# Altium PCB PCB2.PcbDoc
Units mm, origin at the board's own origin, x right, y up, seen from the top; angles counter-clockwise.
Board outline 30.05 x 22.15 mm, 2 copper layers (Top Layer, Bottom Layer); 7 components, 5 nets, 17 pads, 1 vias.
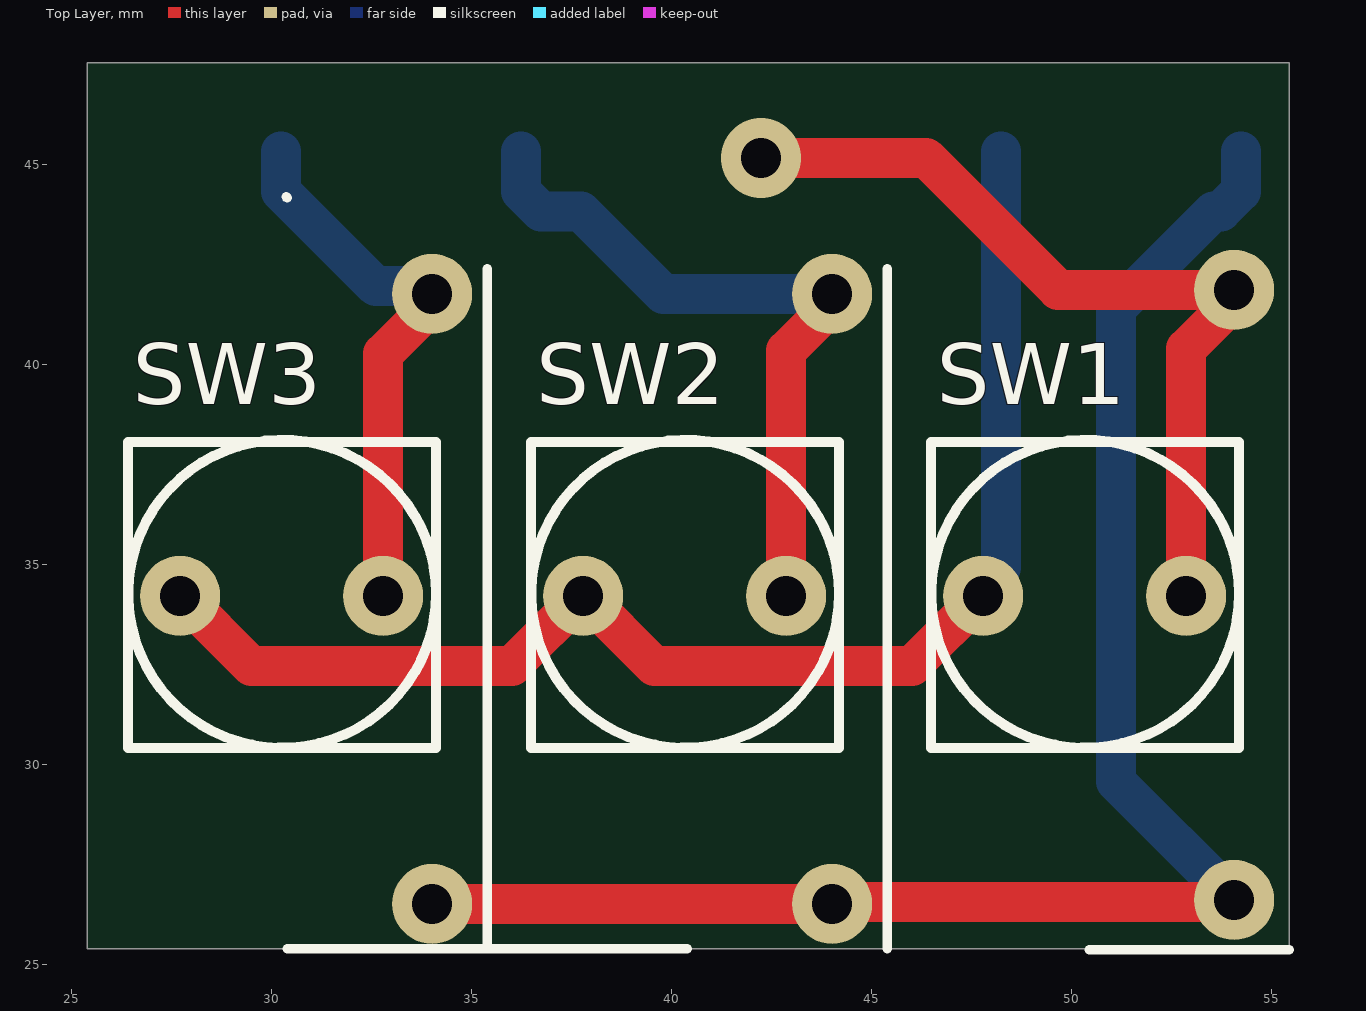
[diagram p0: Top Layer view]
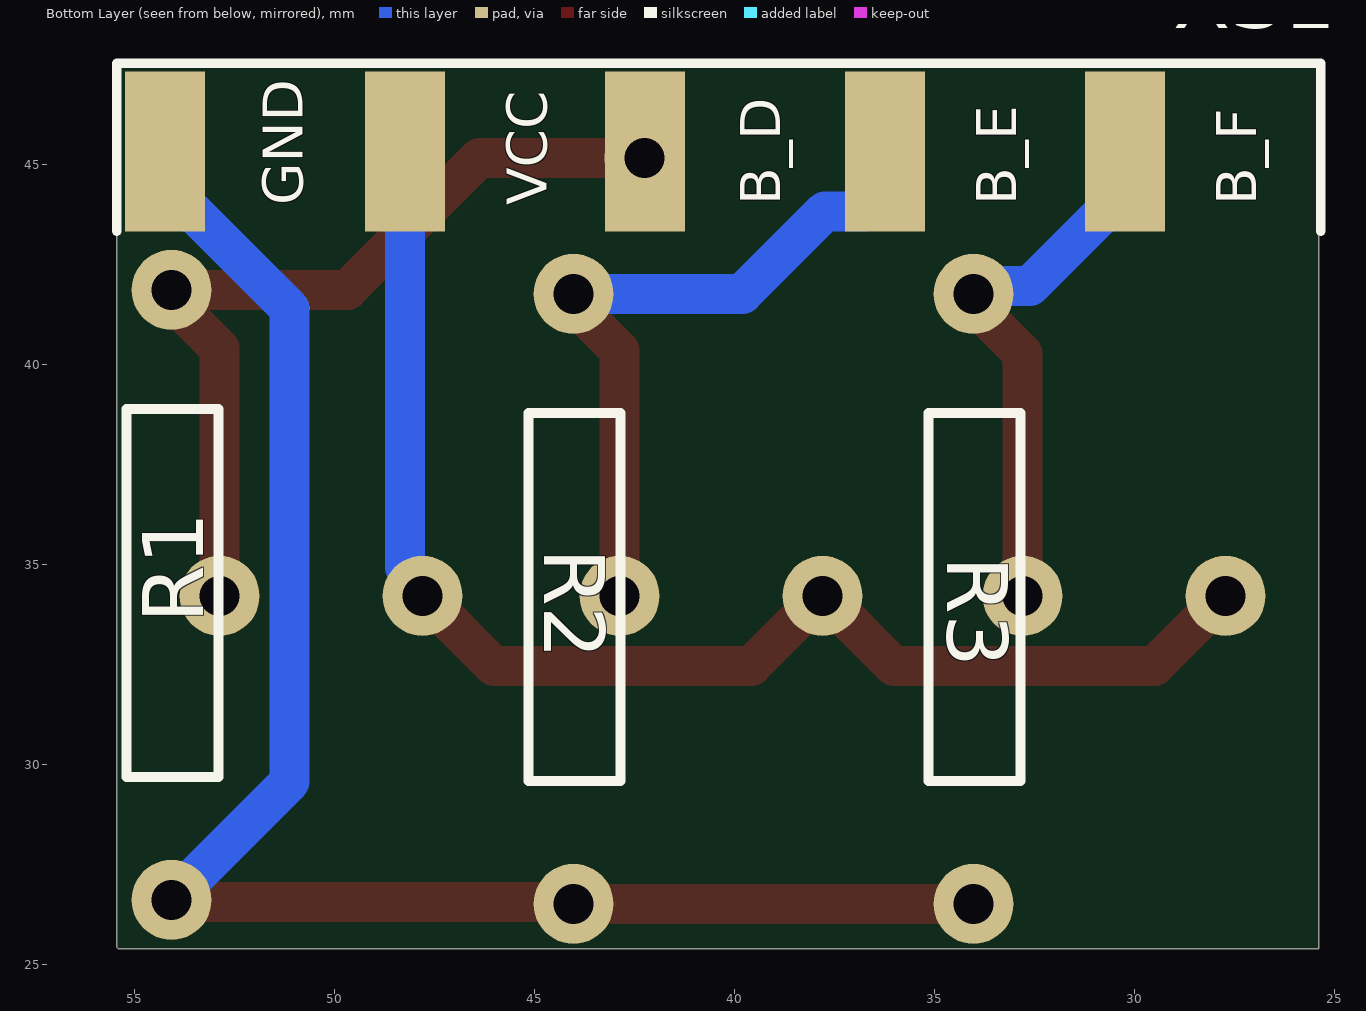
[diagram p1: Bottom Layer view, seen from below]
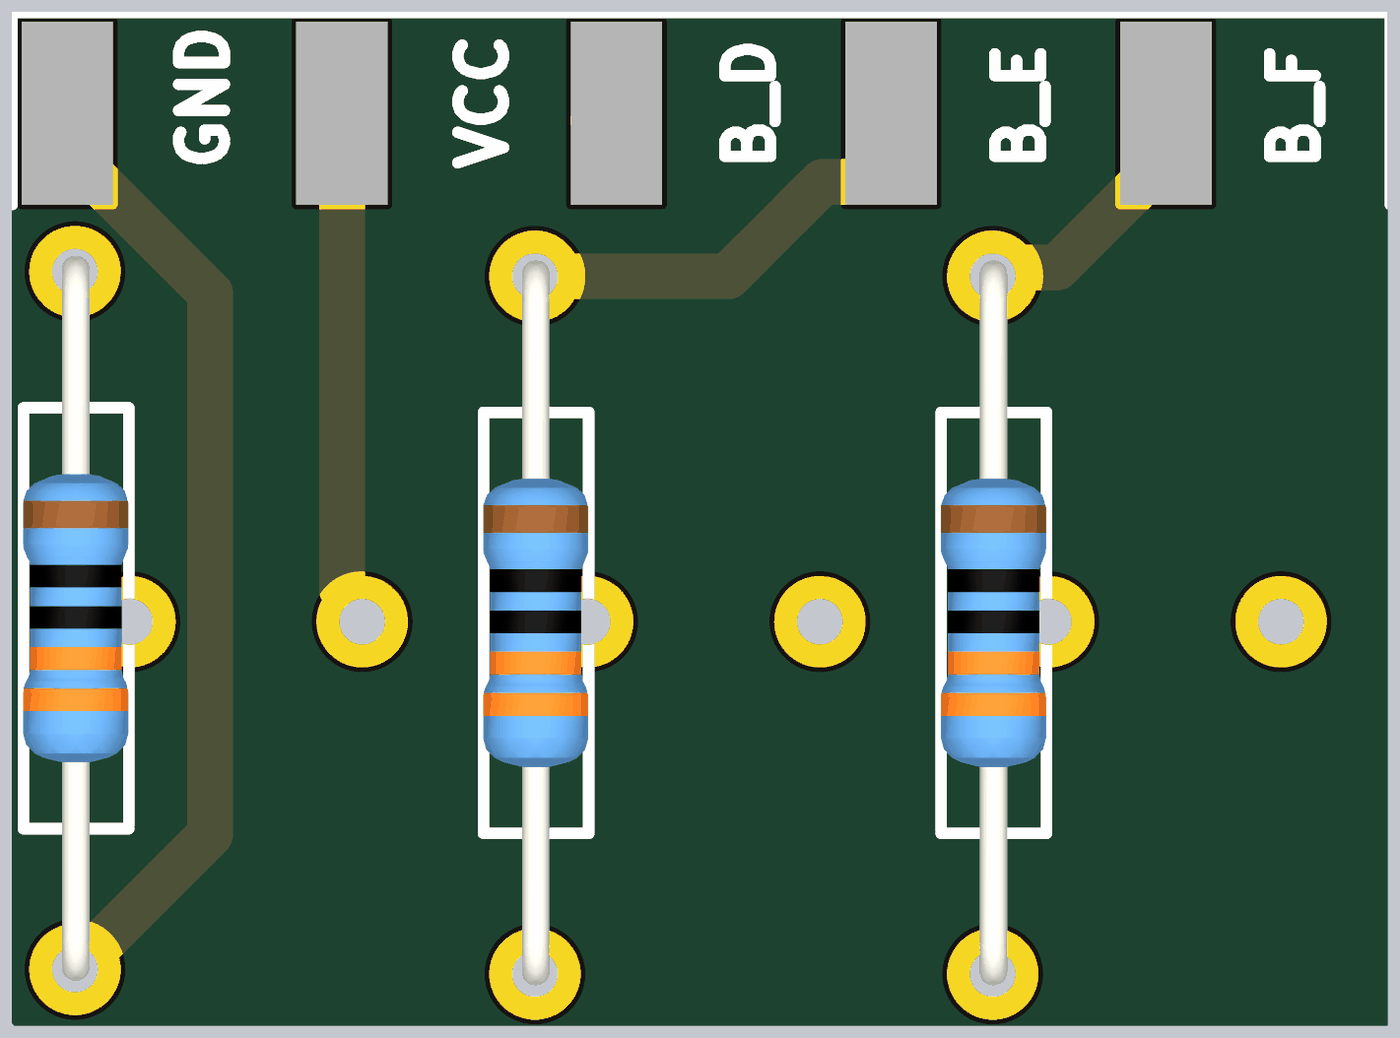
[diagram p2: 3D render of the assembled board from below, using the file's embedded part models]

## Layer stack, top to bottom
Top Solder: solder mask 0.0102, Solder Resist, Dk 3.5
Top Layer: signal copper 0.0356
Dielectric 1: dielectric 0.32, FR-4, Dk 4.8
Bottom Layer: signal copper 0.0356
Bottom Solder: solder mask 0.0102, Solder Resist, Dk 3.5

## Board outline
25.4,25.4 55.4,25.4 55.45,25.45 55.45,47.55 25.4,47.55

## Design rules (kind name [scope] priority, off if disabled: settings)
Clearance [All] p1: gap=0.254 ignorepadtopadclearanceinfootprint=FALSE
PolygonConnect [All] p1: connectstyle=Relief reliefconductorwidth=0.254 reliefentries=4 polygonreliefangle="90 Angle" airgapwidth=0.254
RoutingVias [All] p1: holewidth=0.711 width=1.27 viastyle="Through Hole" minholewidth=0.711 minwidth=1.27 maxholewidth=0.711 maxwidth=1.27
SolderMaskExpansion [All] p1: expansion=0.102 istentingtop=FALSE
SupplyNets "Schematic Supply Nets_1" [InNet('GND')] p1: voltage=0.000
SupplyNets "Schematic Supply Nets" [InNet('+5V')] p2: voltage=0.000
Width [All] p1: maxlimit=1 minlimit=0.3 preferedwidth=0.5 minimp=50.000000 maximp=50.000000 favimp=50.000000
30 further rules are at their usual default settings.

## Classes and differential pairs
component class Sheet2: R1 R2 R3 SW1 SW2 SW3

## Components (designator, comment, footprint, x,y, rotation, side; value= is the part's Value field where it differs from the comment)
R1 "resistor" Resistor 54.05,34.3 r0 bottom
R2 "resistor" Resistor 44,34.2 r0 bottom
R3 "resistor" Resistor 34,34.2 r0 bottom
SW1 "button" button 50.35,34.275 r180 top
SW2 "button" button 40.35,34.275 r180 top
SW3 "button" button 30.275,34.275 r180 top
XS1 "Connector" ConnectionModule 54.243,45.339 r180 bottom

## Footprints (in the part's own frame and the unit in brackets; to place one, negate y for a bottom-side part, rotate by r counter-clockwise, add the part's x,y. Pads: shape width x height; smd on the part's side, far side on the other; paste and mask are expansions set on the pad)
button [mm]
  round 2 hole 1: 1(-2.525,0.05) 2(2.55,0.05)
  silkscreen extent -3.85,-3.85 3.85,3.85
ConnectionModule [mm]
  rect 2x4 smd: 1(0,0) 2(6,0) 3(12,0) 4(18,0) 5(24,0)
  silkscreen extent -1.2,-2 28.9,2.2
Resistor [mm]
  round 2 hole 1: 1(0.025,7.675) 2(0.025,-7.575)
  silkscreen extent -1.15,-4.6 1.15,4.6, body extent -1.14,-7.92 1.15,7.92, height 2.3

## Part data
XS1: library part ConnectionModule

## Via types
v1: diameter 2, hole 1, Top Layer to Bottom Layer, 1 vias

## Nets (pads, with @x,y where several pads share a name; then routed paths per layer and width w, separated by ;. In a path a pad name is that pad's centre, name@x,y a point inside that pad or via, vN(x,y) a via of type N, cw(c..) or ccw(c..) an arc to the next point about the centre after c; other vN are vias at no path point)
+5V: SW1.2 SW2.2 SW3.2 XS1.2 | length 34.3
  Top Layer w1: SW3.2 27.753,34.225 29.507,32.471 36.018,32.471 37.772,34.225 SW2.2 37.828,34.225 39.582,32.471 46.018,32.471 47.772,34.225 SW1.2
  Bottom Layer w1: SW1.2 47.8,34.496 48.243,34.939 XS1.2
GND: R1.1 R2.1 R3.1 XS1.1 | length 41.4
  Top Layer w1: R3.1 R2.1 44.075,26.575 54.025,26.575 R1.1
  Bottom Layer w1: R1.1 51.121,29.579 51.121,41.402 53.558,43.839 53.743,43.839 54.243,44.339 XS1.1
NetR1_2: R1.2 SW1.1 XS1.3 | length 21.3
  Top Layer w1: v1(42.25,45.175) 46.377,45.175 49.677,41.875 R1.2 54.075,41.604 52.875,40.404 SW1.1
NetR2_2: R2.2 SW2.1 XS1.4 | length 17.9
  Top Layer w1: SW2.1 42.875,40.354 44.025,41.504 R2.2
  Bottom Layer w1: XS1.4 36.243,44.339 36.743,43.839 37.743,43.839 39.807,41.775 R2.2
NetR3_2: R3.2 SW3.1 XS1.5 | length 13.9
  Top Layer w1: SW3.1 32.8,40.279 34.025,41.504 R3.2
  Bottom Layer w1: XS1.5 30.243,44.339 32.616,41.966 33.834,41.966 R3.2

## Silkscreen, mask and mechanical layers (free items; w line width, h text height)
Top Overlay:
  lines w0.24: 30.375,44.2 30.4,44.175 ; 30.4,25.4 35.4,25.4 ; 35.4,42.4 35.4,25.4 ; 40.4,25.4 35.4,25.4 ; 45.4,25.4 45.4,42.4 ; 50.45,25.375 55.45,25.375
Mechanical 1:
  the board outline again, w0.24

## Text inside footprints (layer, text, board x,y; h text height)
XS1: Bottom Overlay "B_F" at 26.964,43.993 h1 r270; Bottom Overlay "B_E" at 32.964,43.993 h1 r270; Bottom Overlay "B_D" at 38.864,43.993 h1 r270; Bottom Overlay "VCC" at 44.697,43.993 h1 r270; Bottom Overlay "GND" at 50.797,43.993 h1 r270